# EAGLE board CT_schematic (EAGLE 7.6.0)

Size 100 x 80 mm. Coordinates in mm from the lower left corner, seen from the top.
Outline: 0,0 100,0 100,80 0,80 0,0
Copper layers (1*16): Top 0.035mm / dielectric 1.5mm / Bottom 0.035mm
Design rules "default": minimum track width 10mil, minimum drill 24mil, track to track 8mil, track to pad 8mil, pad to pad 8mil, via to via 8mil, smd to smd 8mil, copper to edge 40mil, drill to drill 8mil, minimum pad ring 10mil, minimum via ring 8mil, stop-mask expansion 4mil, vias tented up to drill 0mil, thermal gap 10mil

## Footprints (pad centres in the part's own frame; a part is rotated, then mirrored left to right if it is on the bottom)
C0603 = smd 0.8 x 0.8: 1 -0.762,0; 2 0.762,0
C0402 = smd 0.5 x 0.5: 1 -0.508,0; 2 0.508,0
C0805 = smd 1.2 x 1.3: 1 -1.016,0; 2 1.016,0
R0603 = smd 0.8 x 0.8: 1 -0.762,0; 2 0.762,0
C1206 = smd 1.3 x 1.6: 1 -1.524,0; 2 1.524,0
C1210 = smd 1.2 x 2.5: 1 -1.524,0; 2 1.524,0
EXV-9H = smd 3.505 x 1.676: 1 -2.857,0; 2 2.857,0
L0603 = smd 0.8 x 0.8: 1 -0.762,0; 2 0.762,0
PJ-037B_PACKAGE = drill 3.7 square: 1 12,0 | drill 3.2 square: 2 6,0
UFBGA169 = smd 0.35 x 0.35: A1 -3.9,3.9; A2 -3.25,3.9; A3 -2.6,3.9; A4 -1.95,3.9; A5 -1.3,3.9; A6 -0.65,3.9; A7 0,3.9; A8 0.65,3.9; A9 1.3,3.9; A10 1.95,3.9; A11 2.6,3.9; A12 3.25,3.9; A13 3.9,3.9; B1 -3.9,3.25; B2 -3.25,3.25; B3 -2.6,3.25; B4 -1.95,3.25; B5 -1.3,3.25; B6 -0.65,3.25; B7 0,3.25; B8 0.65,3.25; B9 1.3,3.25; B10 1.95,3.25; B11 2.6,3.25; B12 3.25,3.25; B13 3.9,3.25; C1 -3.9,2.6; C2 -3.25,2.6; C3 -2.6,2.6; C4 -1.95,2.6; C5 -1.3,2.6; C6 -0.65,2.6; C7 0,2.6; C8 0.65,2.6; C9 1.3,2.6; C10 1.95,2.6; C11 2.6,2.6; C12 3.25,2.6; C13 3.9,2.6; D1 -3.9,1.95; D2 -3.25,1.95; D3 -2.6,1.95; D4 -1.95,1.95; D5 -1.3,1.95; D6 -0.65,1.95; D7 0,1.95; D8 0.65,1.95; D9 1.3,1.95; D10 1.95,1.95; D11 2.6,1.95; D12 3.25,1.95; D13 3.9,1.95; E1 -3.9,1.3; E2 -3.25,1.3; E3 -2.6,1.3; E4 -1.95,1.3; E5 -1.3,1.3; E6 -0.65,1.3; E7 0,1.3; E8 0.65,1.3; E9 1.3,1.3; E10 1.95,1.3; E11 2.6,1.3; E12 3.25,1.3; E13 3.9,1.3; F1 -3.9,0.65; F2 -3.25,0.65; F3 -2.6,0.65; F4 -1.95,0.65; F5 -1.3,0.65; F6 -0.65,0.65; F7 0,0.65; F8 0.65,0.65; F9 1.3,0.65; F10 1.95,0.65; F11 2.6,0.65; F12 3.25,0.65; F13 3.9,0.65; G1 -3.9,0; G2 -3.25,0; G3 -2.6,0; G4 -1.95,0; G5 -1.3,0; G6 -0.65,0; G7 0,0; G8 0.65,0; G9 1.3,0; G10 1.95,0; G11 2.6,0; G12 3.25,0; G13 3.9,0; H1 -3.9,-0.65; H2 -3.25,-0.65; H3 -2.6,-0.65; H4 -1.95,-0.65; H5 -1.3,-0.65; H6 -0.65,-0.65; H7 0,-0.65; H8 0.65,-0.65; H9 1.3,-0.65; H10 1.95,-0.65; H11 2.6,-0.65; H12 3.25,-0.65; H13 3.9,-0.65; J1 -3.9,-1.3; J2 -3.25,-1.3; J3 -2.6,-1.3; J4 -1.95,-1.3; J5 -1.3,-1.3; J6 -0.65,-1.3; J7 0,-1.3; J8 0.65,-1.3; J9 1.3,-1.3; J10 1.95,-1.3; J11 2.6,-1.3; J12 3.25,-1.3; J13 3.9,-1.3; K1 -3.9,-1.95; K2 -3.25,-1.95; K3 -2.6,-1.95; K4 -1.95,-1.95; K5 -1.3,-1.95; K6 -0.65,-1.95; K7 0,-1.95; K8 0.65,-1.95; K9 1.3,-1.95; K10 1.95,-1.95; K11 2.6,-1.95; K12 3.25,-1.95; K13 3.9,-1.95; L1 -3.9,-2.6; L2 -3.25,-2.6; L3 -2.6,-2.6; L4 -1.95,-2.6; L5 -1.3,-2.6; L6 -0.65,-2.6; L7 0,-2.6; L8 0.65,-2.6; L9 1.3,-2.6; L10 1.95,-2.6; L11 2.6,-2.6; L12 3.25,-2.6; L13 3.9,-2.6; M1 -3.9,-3.25; M2 -3.25,-3.25; M3 -2.6,-3.25; M4 -1.95,-3.25; M5 -1.3,-3.25; M6 -0.65,-3.25; M7 0,-3.25; M8 0.65,-3.25; M9 1.3,-3.25; M10 1.95,-3.25; M11 2.6,-3.25; M12 3.25,-3.25; M13 3.9,-3.25; N1 -3.9,-3.9; N2 -3.25,-3.9; N3 -2.6,-3.9; N4 -1.95,-3.9; N5 -1.3,-3.9; N6 -0.65,-3.9; N7 0,-3.9; N8 0.65,-3.9; N9 1.3,-3.9; N10 1.95,-3.9; N11 2.6,-3.9; N12 3.25,-3.9; N13 3.9,-3.9
TST-110-05-T-D-RA = drill 1 pad 1.7 square: 1 0,0 | drill 1 pad 1.7: 2 0,2.54; 3 2.54,0; 4 2.54,2.54; 5 5.08,0; 6 5.08,2.54; 7 7.62,0; 8 7.62,2.54; 9 10.16,0; 10 10.16,2.54; 11 12.7,0; 12 12.7,2.54; 13 15.24,0; 14 15.24,2.54; 15 17.78,0; 16 17.78,2.54; 17 20.32,0; 18 20.32,2.54; 19 22.86,0; 20 22.86,2.54
TDFN-8/6MM = smd 0.3 x 0.75: 1 0,0; 2 0.5,0; 3 1,0; 4 1.5,0; 5 1.5,3; 6 1,3; 7 0.5,3; 8 0,3
MOLEX_47219-2001 = smd 0.8 x 1.5: 1 3.2,-2.1; 2 2.1,-2.1; 3 1,-2.1; 4 -0.1,-2.1; 5 -1.2,-2.1; 6 -2.3,-2.1; 7 -3.4,-2.1; 8 -4.5,-2.1 | smd 1.5 x 2.05: G1 6.875,-4.7; G2 6.875,3.6; G3 -6.875,3.6; G4 -6.875,-4.7
VFBGA-63 = smd 0.4 x 0.4: A1 -3.6,4.4; A2 -2.8,4.4; A9 2.8,4.4; A10 3.6,4.4; B1 -3.6,3.6; B9 2.8,3.6; B10 3.6,3.6; C3 -2,2.8; C4 -1.2,2.8; C5 -0.4,2.8; C6 0.4,2.8; C7 1.2,2.8; C8 2,2.8; D3 -2,2; D4 -1.2,2; D5 -0.4,2; D6 0.4,2; D7 1.2,2; D8 2,2; E3 -2,1.2; E4 -1.2,1.2; E5 -0.4,1.2; E6 0.4,1.2; E7 1.2,1.2; E8 2,1.2; F3 -2,0.4; F4 -1.2,0.4; F5 -0.4,0.4; F6 0.4,0.4; F7 1.2,0.4; F8 2,0.4; G3 -2,-0.4; G4 -1.2,-0.4; G5 -0.4,-0.4; G6 0.4,-0.4; G7 1.2,-0.4; G8 2,-0.4; H3 -2,-1.2; H4 -1.2,-1.2; H5 -0.4,-1.2; H6 0.4,-1.2; H7 1.2,-1.2; H8 2,-1.2; J3 -2,-2; J4 -1.2,-2; J5 -0.4,-2; J6 0.4,-2; J7 1.2,-2; J8 2,-2; K3 -2,-2.8; K4 -1.2,-2.8; K5 -0.4,-2.8; K6 0.4,-2.8; K7 1.2,-2.8; K8 2,-2.8; L1 -3.6,-3.6; L2 -2.8,-3.6; L9 2.8,-3.6; L10 3.6,-3.6; M1 -3.6,-4.4; M2 -2.8,-4.4; M9 2.8,-4.4; M10 3.6,-4.4
RHB32_3P45X3P45 = smd 0.85 x 0.28: 1 -2.475,1.75; 2 -2.475,1.25; 3 -2.475,0.75; 4 -2.475,0.25; 5 -2.475,-0.25; 6 -2.475,-0.75; 7 -2.475,-1.25; 8 -2.475,-1.75; 17 2.475,-1.75; 18 2.475,-1.25; 19 2.475,-0.75; 20 2.475,-0.25; 21 2.475,0.25; 22 2.475,0.75; 23 2.475,1.25; 24 2.475,1.75 | smd 0.28 x 0.85: 9 -1.75,-2.475; 10 -1.25,-2.475; 11 -0.75,-2.475; 12 -0.25,-2.475; 13 0.25,-2.475; 14 0.75,-2.475; 15 1.25,-2.475; 16 1.75,-2.475; 25 1.75,2.475; 26 1.25,2.475; 27 0.75,2.475; 28 0.25,2.475; 29 -0.25,2.475; 30 -0.75,2.475; 31 -1.25,2.475; 32 -1.75,2.475 | smd 3.45 x 3.45: 33 0,0
USB-A-H = drill 0.914: 1 2.718,3.493; 2 2.718,1.003; 3 2.718,-1.003; 4 2.718,-3.493 | drill 2.311: 5 0,-6.566; 6 0,6.566
SOT143B = smd 1 x 0.7: 1 -0.75,-1 | smd 0.6 x 0.7: 2 0.95,-1; 3 0.95,1; 4 -0.95,1
SOT-23-6 = smd 1.1 x 0.6: 1 -1.4,0.95; 2 -1.4,0; 3 -1.4,-0.95; 4 1.4,-0.95; 5 1.4,0; 6 1.4,0.95
ABS07-32.768KHZ-7-T = smd 1.1 x 2.4: 1 -2.5,0; 2 0,0
ABLS-25.000MHZ-B2F-T = smd 5.6 x 2.8: 1 -3.81,0; 2 5.69,0
ASFL1 = smd 1.7 x 1.5: 1 -1.27,-1.1; 2 1.27,-1.1; 3 1.27,1.1; 4 -1.27,1.1
WSON-8 = smd 0.3 x 0.6: 1 -0.75,0; 2 0.05,0; 3 0.85,0; 4 1.65,0; 5 1.65,3.8; 6 0.85,3.8; 7 0.05,3.8; 8 -0.75,3.8 | smd 3 x 2.6: PAD 0.45,1.9
SON-6 = smd 0.55 x 0.3: 1 -0.355,0.5 | smd 0.52 x 0.3: 2 -0.37,0; 3 -0.37,-0.5; 4 0.37,-0.5; 5 0.37,0; 6 0.37,0.5
SW_4-1437565-2 = smd 1.4 x 2.1: 1 -2.23,4.55; 2 -2.23,-4.55; 3 2.23,4.55; 4 2.23,-4.55
LGM67K-G1J2-24-Z = smd 0.8 x 1.4: A -2,0; C 0,0
NC7SZ125M5X = smd 1.3 x 0.7: 1 -1.3,0.95; 2 -1.3,0; 3 -1.3,-0.95; 4 1.3,-0.95; 5 1.3,0.95

## Placement (x,y rotation side)
C1  1e-06  [C0603]  -41.91,74.93 0 top  (outside the outline)
C2  1e-07  [C0603]  -45.72,74.93 0 top  (outside the outline)
C3  1e-07  [C0603]  -49.53,74.93 0 top  (outside the outline)
C4  1e-07  [C0603]  -53.34,74.93 0 top  (outside the outline)
C5  1e-07  [C0603]  -57.15,74.93 0 top  (outside the outline)
C6  1e-07  [C0603]  -60.96,74.93 0 top  (outside the outline)
C7  1e-07  [C0603]  -64.77,74.93 0 top  (outside the outline)
C8  1e-07  [C0603]  -68.58,74.93 0 top  (outside the outline)
C9  1e-07  [C0603]  -72.39,74.93 0 top  (outside the outline)
C10  1e-07  [C0603]  -76.2,74.93 0 top  (outside the outline)
C11  1e-07  [C0603]  -80.01,74.93 0 top  (outside the outline)
C12  1e-07  [C0603]  -83.82,74.93 0 top  (outside the outline)
C13  1e-07  [C0603]  -15.24,80.01 0 top  (outside the outline)
C14  1e-07  [C0603]  -19.05,80.01 0 top  (outside the outline)
C15  1e-07  [C0603]  -22.86,80.01 0 top  (outside the outline)
C16  1e-07  [C0603]  -26.67,80.01 0 top  (outside the outline)
C17  4.7e-06  [C0603]  -19.05,74.93 0 top  (outside the outline)
C18  2.2e-06  [C0603]  -22.86,74.93 0 top  (outside the outline)
C19  2.2e-06  [C0603]  -26.67,74.93 0 top  (outside the outline)
C20  1e-08  [C0603]  -30.48,80.01 0 top  (outside the outline)
C21  1e-06  [C0603]  -34.29,80.01 0 top  (outside the outline)
C22  1e-07  [C0603]  -38.1,80.01 0 top  (outside the outline)
C23  1e-11  [C0402]  -15.24,85.09 0 top  (outside the outline)
C24  1e-11  [C0402]  -19.05,85.09 0 top  (outside the outline)
C25  1e-11  [C0402]  -22.86,85.09 0 top  (outside the outline)
C26  1e-11  [C0402]  -26.67,85.09 0 top  (outside the outline)
C27  1e-07  [C0402]  -30.48,85.09 0 top  (outside the outline)
C28  1e-07  [C0402]  -34.29,85.09 0 top  (outside the outline)
C29  1e-08  [C0402]  -38.1,85.09 0 top  (outside the outline)
C30  1e-07  [C0402]  -41.91,85.09 0 top  (outside the outline)
C31  1e-05  [C0805]  -58.42,58.42 0 top  (outside the outline)
C32  1e-07  [C0402]  -45.72,85.09 0 top  (outside the outline)
C33  1e-07  [C0402]  -49.53,85.09 0 top  (outside the outline)
C34  1e-07  [C0402]  -53.34,85.09 0 top  (outside the outline)
C35  1e-07  [C0402]  -57.15,85.09 0 top  (outside the outline)
C36  2.2e-06  [C0603]  -30.48,74.93 0 top  (outside the outline)
C37  1e-07  [C0402]  -60.96,85.09 0 top  (outside the outline)
C38  2.2e-06  [C0603]  -34.29,74.93 0 top  (outside the outline)
C39  1e-07  [C0402]  -64.77,85.09 0 top  (outside the outline)
C40  1e-07  [C0402]  -68.58,85.09 0 top  (outside the outline)
C41  2.2e-06  [C0603]  -38.1,74.93 0 top  (outside the outline)
C42  0.0001  [R0603]  -41.91,80.01 0 top  (outside the outline)
C43  1e-08  [C0402]  -72.39,85.09 0 top  (outside the outline)
C44  1e-08  [C0402]  -76.2,85.09 0 top  (outside the outline)
C45  1e-05  [C1206]  -22.86,58.42 0 top  (outside the outline)
C46  1e-05  [C0805]  -63.5,58.42 0 top  (outside the outline)
C47  1e-06  [C0603]  -45.72,80.01 0 top  (outside the outline)
C48  1e-05  [C1210]  -78.74,52.07 0 top  (outside the outline)
C49  1e-08  [C0402]  -80.01,85.09 0 top  (outside the outline)
C50  1e-05  [C1206]  -29.21,58.42 0 top  (outside the outline)
C51  1e-05  [C1210]  -16.51,58.42 0 top  (outside the outline)
C52  1e-07  [C0402]  -83.82,85.09 0 top  (outside the outline)
C53  0.0001  [EXV-9H]  -54.61,44.45 0 top  (outside the outline)
C54  0.0001  [EXV-9H]  -66.04,44.45 0 top  (outside the outline)
C55  1e-08  [C0402]  -15.24,90.17 0 top  (outside the outline)
C56  1e-08  [C0402]  -19.05,90.17 0 top  (outside the outline)
C57  1e-08  [C0402]  -22.86,90.17 0 top  (outside the outline)
F1  240.0  [L0603]  -49.53,80.01 0 top  (outside the outline)
J1  PJ-037B  [PJ-037B_PACKAGE]  -80.01,7.62 0 top  (outside the outline)
R2  1000.0  [R0603]  -53.34,80.01 0 top  (outside the outline)
R4  4700.0  [R0603]  -57.15,80.01 0 top  (outside the outline)
R5  4700.0  [R0603]  -60.96,80.01 0 top  (outside the outline)
R6  2200.0  [R0603]  -64.77,80.01 0 top  (outside the outline)
R7  2200.0  [R0603]  -68.58,80.01 0 top  (outside the outline)
R8  10000.0  [R0603]  -60.96,64.77 0 top  (outside the outline)
R9  10000.0  [R0603]  -66.04,64.77 0 top  (outside the outline)
R10  10000.0  [R0603]  -71.12,64.77 0 top  (outside the outline)
R11  10000.0  [R0603]  -76.2,64.77 0 top  (outside the outline)
R12  10000.0  [R0603]  -81.28,64.77 0 top  (outside the outline)
R13  10000.0  [R0603]  -15.24,69.85 0 top  (outside the outline)
R14  10000.0  [R0603]  -20.32,69.85 0 top  (outside the outline)
R15  10000.0  [R0603]  -25.4,69.85 0 top  (outside the outline)
R16  10000.0  [R0603]  -30.48,69.85 0 top  (outside the outline)
R17  100000.0  [R0603]  -73.66,58.42 0 top  (outside the outline)
R18  100000.0  [R0603]  -78.74,58.42 0 top  (outside the outline)
R19  100000.0  [R0603]  -83.82,58.42 0 top  (outside the outline)
R20  100000.0  [R0603]  -15.24,64.77 0 top  (outside the outline)
R21  100000.0  [R0603]  -20.32,64.77 0 top  (outside the outline)
R22  100000.0  [R0603]  -25.4,64.77 0 top  (outside the outline)
R23  10000.0  [R0603]  -35.56,69.85 0 top  (outside the outline)
R24  10000.0  [R0603]  -40.64,69.85 0 top  (outside the outline)
R25  10000.0  [R0603]  -45.72,69.85 0 top  (outside the outline)
R26  10000.0  [R0603]  -50.8,69.85 0 top  (outside the outline)
R27  10000.0  [R0603]  -55.88,69.85 0 top  (outside the outline)
R28  47000.0  [R0603]  -60.96,69.85 0 top  (outside the outline)
R29  10000.0  [R0603]  -66.04,69.85 0 top  (outside the outline)
R30  10000.0  [R0603]  -71.12,69.85 0 top  (outside the outline)
R31  100000.0  [R0603]  -30.48,64.77 0 top  (outside the outline)
R32  806.0  [R0603]  -72.39,80.01 0 top  (outside the outline)
R33  1000.0  [R0603]  -76.2,80.01 0 top  (outside the outline)
R34  100000.0  [R0603]  -35.56,64.77 0 top  (outside the outline)
R35  153694.38  [R0603]  -68.58,58.42 0 top  (outside the outline)
R36  100000.0  [R0603]  -40.64,64.77 0 top  (outside the outline)
R37  100000.0  [R0603]  -45.72,64.77 0 top  (outside the outline)
R38  3900.0  [R0603]  -80.01,80.01 0 top  (outside the outline)
R39  1000.0  [R0603]  -83.82,80.01 0 top  (outside the outline)
R40  10000.0  [R0603]  -76.2,69.85 0 top  (outside the outline)
R41  10000.0  [R0603]  -81.28,69.85 0 top  (outside the outline)
R42  82000.0  [R0603]  -15.24,74.93 0 top  (outside the outline)
R43  300000.0  [R0603]  -50.8,64.77 0 top  (outside the outline)
R44  120000.0  [R0603]  -55.88,64.77 0 top  (outside the outline)
U1  STM32F479AIH6  [UFBGA169]  -59.69,7.62 0 top  (outside the outline)
U2  TST-110-05-T-D-RA  [TST-110-05-T-D-RA]  -46.99,41.91 0 top  (outside the outline)
U3  24AA16-I/MC  [TDFN-8/6MM]  -52.07,21.59 0 top  (outside the outline)
U4  0472192001  [MOLEX_47219-2001]  -39.37,8.89 0 top  (outside the outline)
U5  mt29f4g08abbdah4  [VFBGA-63]  -17.78,24.13 0 top  (outside the outline)
U6  TUSB1210BRHBR  [RHB32_3P45X3P45]  -38.1,52.07 0 top  (outside the outline)
U7  61400416021  [USB-A-H]  -19.05,8.89 0 top  (outside the outline)
U8  prtr5v0u2ax  [SOT143B]  -35.56,90.17 0 top  (outside the outline)
U9  MAX4995AAUT+T  [SOT-23-6]  -34.29,57.15 0 top  (outside the outline)
U10  ABS07-32.768KHZ-7-T  [ABS07-32.768KHZ-7-T]  -58.42,52.07 0 top  (outside the outline)
U11  ABLS-25.000MHZ-B2F-T  [ABLS-25.000MHZ-B2F-T]  -26.67,52.07 0 top  (outside the outline)
U12  ASFL1-19.2MHZ-NCS  [ASFL1]  -66.04,35.56 0 top  (outside the outline)
U13  LP3878SDX-ADJ/NOPB  [WSON-8]  -72.39,20.32 0 top  (outside the outline)
U14  LP2951ACSDX/NOPB  [WSON-8]  -48.26,34.29 0 top  (outside the outline)
U15  LP3878SDX-ADJ/NOPB  [WSON-8]  -30.48,34.29 0 top  (outside the outline)
U16  TPS3895ADRYR  [SON-6]  -39.37,88.9 0 top  (outside the outline)
U17  4-1437565-2  [SW_4-1437565-2]  -38.1,24.13 0 top  (outside the outline)
U18  Q65110A2395  [LGM67K-G1J2-24-Z]  -67.31,52.07 0 top  (outside the outline)
U19  nc7sz125m5x  [NC7SZ125M5X]  -39.37,58.42 0 top  (outside the outline)
U20  nc7sz125m5x  [NC7SZ125M5X]  -45.72,58.42 0 top  (outside the outline)
U21  nc7sz125m5x  [NC7SZ125M5X]  -52.07,58.42 0 top  (outside the outline)

## Library data of the parts
C1-C57 F1 J1 R2 R4-R44 U1-U21 = circuit_tree

## Nets
CLK_CRYSTAL_U1_E1: C23.1 U1.E1 U10.1
CLK_CRYSTAL_U1_F1: C24.1 U1.F1 U10.2
CLK_CRYSTAL_U1_G1: C25.1 U1.G1 U11.1
CLK_CRYSTAL_U1_G2: C26.1 U1.G2 U11.2
CLK_U6_1: U6.1 U12.3
GND: C1.2 C2.2 C3.2 C4.2 C5.2 C6.2 C7.2 C8.2 C9.2 C10.2 C11.2 C12.2 C13.2 C14.2 C15.2 C16.2 C17.2 C18.2 C19.2 C20.2 C21.2 C22.2 C23.2 C24.2 C25.2 C26.2 C27.2 C28.2 C29.2 C30.2 C31.2 C32.2 C33.2 C34.2 C35.2 C36.2 C37.2 C38.2 C39.2 C40.2 C41.2 C42.2 C43.2 C44.2 C45.2 C46.2 C47.2 C48.2 C49.2 C50.2 C51.2 C52.2 C53.2 C54.2 C55.2 C56.2 C57.2 J1.2 R2.2 R16.2 R28.2 R30.2 R33.2 R36.2 R39.2 R42.2 R44.2 U1.D11 U1.E3 U1.F5 U1.F8 U1.G7 U1.G9 U1.H11 U1.J1 U1.J2 U1.J6 U1.J7 U1.J10 U1.K11 U1.M9 U2.4 U2.6 U2.8 U2.10 U2.12 U2.14 U2.16 U2.18 U2.20 U3.4 U3.7 U4.6 U4.G1 U4.G2 U4.G3 U4.G4 U5.C5 U5.F7 U5.K3 U5.K8 U6.23 U6.33 U7.4 U7.5 U7.6 U8.1 U9.2 U12.2 U13.3 U13.PAD U14.3 U14.4 U14.PAD U15.3 U15.PAD U16.2 U18.C U19.2 U19.3 U20.1 U20.3 U21.1 U21.3
NET_U1_A5: R9.1 U1.A5
NET_U1_B4: R7.1 U1.B4 U3.5
NET_U1_C3: R8.1 U1.C3
NET_U1_C5: R6.1 U1.C5 U3.6
NET_U1_D12: C19.1 U1.D12
NET_U1_H2: R4.1 U1.H2 U20.4
NET_U1_J3: C20.1 C21.1 F1.1 U1.J3
NET_U1_J11: U1.J11
NET_U1_K12: U1.K12
NET_U1_L5: R10.1 U1.L5
NET_U1_N9: C18.1 U1.N9
NET_U1_N12: U18.A
NET_U1_N13: U17.3 U17.4
NET_U2_19: R16.1 U2.19
NET_U5_C3: R27.1 U5.C3
NET_U6_11: R29.1 U6.11
NET_U6_12: C41.1 U6.12
NET_U6_14: R30.1 U6.14
NET_U6_20: C38.1 U6.20
NET_U6_27: R5.1 U6.27 U21.4
NET_U7_1: C42.1 U6.22 U7.1 U8.4 U9.1
NET_U7_2: U6.19 U7.2 U8.3
NET_U7_3: U6.18 U7.3 U8.2
NET_U9_3: R28.1 U9.3
NET_U9_4: U6.17 U9.4
NET_U13_1: C44.1 U13.1
NET_U13_6: R32.2 R33.1 U13.6
NET_U13_8: R31.1 U13.8
NET_U14_5: R34.1 U14.5
NET_U14_7: R35.2 R36.1 U14.7
NET_U15_1: C49.1 U15.1
NET_U15_6: R38.2 R39.1 U15.6
NET_U15_8: R37.1 U15.8
NET_U16_1: R41.1 R42.1 U16.1
NET_U16_3: R43.2 R44.1 U16.3
NET_U16_4: R40.1 U16.4 U19.4 U20.2 U21.2
NET_U17_1: R2.1 U17.1 U17.2
PROC_FMC_A16: U1.M11 U5.D5
PROC_FMC_A17: U1.M13 U5.C4
PROC_FMC_D0: U1.L12 U5.H4
PROC_FMC_D1: U1.L13 U5.J4
PROC_FMC_D2: U1.C9 U5.K4
PROC_FMC_D3: U1.C7 U5.K5
PROC_FMC_D4: U1.N7 U5.K6
PROC_FMC_D5: U1.G6 U5.J7
PROC_FMC_D6: U1.H6 U5.K7
PROC_FMC_D7: U1.H7 U5.J8
PROC_FMC_INT: R23.1 U1.E11 U5.C8
PROC_FMC_NCE: R24.1 U1.E6 U5.C6
PROC_FMC_NOE: R26.1 U1.C6 U5.D4
PROC_FMC_NWE: R25.1 U1.B7 U5.C7
PROC_SDIO_CK: R18.1 U1.A9 U4.5
PROC_SDIO_CMD: R17.1 U1.B8 U4.3
PROC_SDIO_D0: R19.1 U1.E10 U4.7
PROC_SDIO_D1: R20.1 U1.G10 U4.8
PROC_SDIO_D2: R21.1 U1.C10 U4.1
PROC_SDIO_D3: R22.1 U1.B9 U4.2
PROC_SYS_JTCK_SWCLK: R14.1 U1.A10 U2.9
PROC_SYS_JTDI: R12.1 U1.B11 U2.5
PROC_SYS_JTDO_SWO: U1.B5 U2.13
PROC_SYS_JTMS_SWDIO: R13.1 U1.A11 U2.7
PROC_SYS_JTRST: R11.1 U1.D6 U2.3
PROC_USB_OTG_HS_ULPI_CK: U1.M3 U6.26
PROC_USB_OTG_HS_ULPI_D0: U1.K3 U6.3
PROC_USB_OTG_HS_ULPI_D1: U1.N4 U6.4
PROC_USB_OTG_HS_ULPI_D2: U1.K5 U6.5
PROC_USB_OTG_HS_ULPI_D3: U1.M8 U6.6
PROC_USB_OTG_HS_ULPI_D4: U1.N8 U6.7
PROC_USB_OTG_HS_ULPI_D5: U1.N10 U6.9
PROC_USB_OTG_HS_ULPI_D6: U1.N11 U6.10
PROC_USB_OTG_HS_ULPI_D7: U1.D5 U6.13
PROC_USB_OTG_HS_ULPI_DIR: U1.F2 U6.31
PROC_USB_OTG_HS_ULPI_NXT: U1.M2 U6.2
PROC_USB_OTG_HS_ULPI_STP: U1.M1 U6.29
RST_OUT_U2_SRESET_B: R15.1 U2.15 U19.1
VCC_S1_7V1: C45.1 C47.1 C50.1 C53.1 C54.1 J1.1 R31.2 R37.2 U13.4 U14.8 U15.4
VCC_TIER1_1V8: C1.1 C2.1 C3.1 C4.1 C5.1 C6.1 C7.1 C8.1 C9.1 C10.1 C11.1 C12.1 C13.1 C14.1 C15.1 C16.1 C17.1 C28.1 C29.1 C30.1 C31.1 C32.1 C33.1 C34.1 C35.1 C36.1 C39.1 C40.1 C46.1 C52.1 C55.1 C56.1 C57.1 F1.2 R4.2 R5.2 R6.2 R7.2 R8.2 R9.2 R10.2 R11.2 R12.2 R13.2 R14.2 R15.2 R17.2 R18.2 R19.2 R20.2 R21.2 R22.2 R23.2 R24.2 R25.2 R26.2 R27.2 R29.2 R32.1 R40.2 R41.2 R43.1 U1.D3 U1.D10 U1.E5 U1.F4 U1.F7 U1.G8 U1.J4 U1.K6 U1.K10 U1.K13 U1.L6 U1.L9 U2.1 U3.8 U4.4 U5.D3 U5.G4 U5.H8 U5.J6 U6.28 U6.30 U6.32 U13.5 U16.6 U19.5 U20.5 U21.5
VCC_TIER1_3V3: C22.1 C27.1 C37.1 C43.1 C48.1 R34.2 R35.1 U1.G11 U2.2 U6.21 U12.4 U14.1
VCC_TIER1_5V0: C51.1 R38.1 U9.5 U15.5

## Tracks (layer width: path | path; a pad name or v marks a point on that pad's centre or on a via)
CLK_CRYSTAL_U1_E1  (2 unrouted)
CLK_CRYSTAL_U1_F1  (2 unrouted)
CLK_CRYSTAL_U1_G1  (2 unrouted)
CLK_CRYSTAL_U1_G2  (2 unrouted)
CLK_U6_1  (1 unrouted)
GND  (123 unrouted)
NET_U1_A5  (1 unrouted)
NET_U1_B4  (2 unrouted)
NET_U1_C3  (1 unrouted)
NET_U1_C5  (2 unrouted)
NET_U1_D12  (1 unrouted)
NET_U1_H2  (2 unrouted)
NET_U1_J3  (3 unrouted)
NET_U1_L5  (1 unrouted)
NET_U1_N9  (1 unrouted)
NET_U1_N13  (1 unrouted)
NET_U2_19  (1 unrouted)
NET_U5_C3  (1 unrouted)
NET_U6_11  (1 unrouted)
NET_U6_12  (1 unrouted)
NET_U6_14  (1 unrouted)
NET_U6_20  (1 unrouted)
NET_U6_27  (2 unrouted)
NET_U7_1  (4 unrouted)
NET_U7_2  (2 unrouted)
NET_U7_3  (2 unrouted)
NET_U9_3  (1 unrouted)
NET_U9_4  (1 unrouted)
NET_U13_1  (1 unrouted)
NET_U13_6  (2 unrouted)
NET_U13_8  (1 unrouted)
NET_U14_5  (1 unrouted)
NET_U14_7  (2 unrouted)
NET_U15_1  (1 unrouted)
NET_U15_6  (2 unrouted)
NET_U15_8  (1 unrouted)
NET_U16_1  (2 unrouted)
NET_U16_3  (2 unrouted)
NET_U16_4  (4 unrouted)
NET_U17_1  (2 unrouted)
PROC_FMC_A16  (1 unrouted)
PROC_FMC_A17  (1 unrouted)
PROC_FMC_D0  (1 unrouted)
PROC_FMC_D1  (1 unrouted)
PROC_FMC_D2  (1 unrouted)
PROC_FMC_D3  (1 unrouted)
PROC_FMC_D4  (1 unrouted)
PROC_FMC_D5  (1 unrouted)
PROC_FMC_D6  (1 unrouted)
PROC_FMC_D7  (1 unrouted)
PROC_FMC_INT  (2 unrouted)
PROC_FMC_NCE  (2 unrouted)
PROC_FMC_NOE  (2 unrouted)
PROC_FMC_NWE  (2 unrouted)
PROC_SDIO_CK  (2 unrouted)
PROC_SDIO_CMD  (2 unrouted)
PROC_SDIO_D0  (2 unrouted)
PROC_SDIO_D1  (2 unrouted)
PROC_SDIO_D2  (2 unrouted)
PROC_SDIO_D3  (2 unrouted)
PROC_SYS_JTCK_SWCLK  (2 unrouted)
PROC_SYS_JTDI  (2 unrouted)
PROC_SYS_JTDO_SWO  (1 unrouted)
PROC_SYS_JTMS_SWDIO  (2 unrouted)
PROC_SYS_JTRST  (2 unrouted)
PROC_USB_OTG_HS_ULPI_CK  (1 unrouted)
PROC_USB_OTG_HS_ULPI_D0  (1 unrouted)
PROC_USB_OTG_HS_ULPI_D1  (1 unrouted)
PROC_USB_OTG_HS_ULPI_D2  (1 unrouted)
PROC_USB_OTG_HS_ULPI_D3  (1 unrouted)
PROC_USB_OTG_HS_ULPI_D4  (1 unrouted)
PROC_USB_OTG_HS_ULPI_D5  (1 unrouted)
PROC_USB_OTG_HS_ULPI_D6  (1 unrouted)
PROC_USB_OTG_HS_ULPI_D7  (1 unrouted)
PROC_USB_OTG_HS_ULPI_DIR  (1 unrouted)
PROC_USB_OTG_HS_ULPI_NXT  (1 unrouted)
PROC_USB_OTG_HS_ULPI_STP  (1 unrouted)
RST_OUT_U2_SRESET_B  (2 unrouted)
VCC_S1_7V1  (10 unrouted)
VCC_TIER1_1V8  (88 unrouted)
VCC_TIER1_3V3  (11 unrouted)
VCC_TIER1_5V0  (3 unrouted)